# Altium PCB PCB1.PcbDoc
Units mm, origin at the board's own origin, x right, y up, seen from the top; angles counter-clockwise.
Board outline 152.4 x 101.6 mm, 2 copper layers (Top Layer, Bottom Layer); 27 components, 31 nets, 130 pads, 0 vias.
Unrouted connection lines stored in the file: 61.
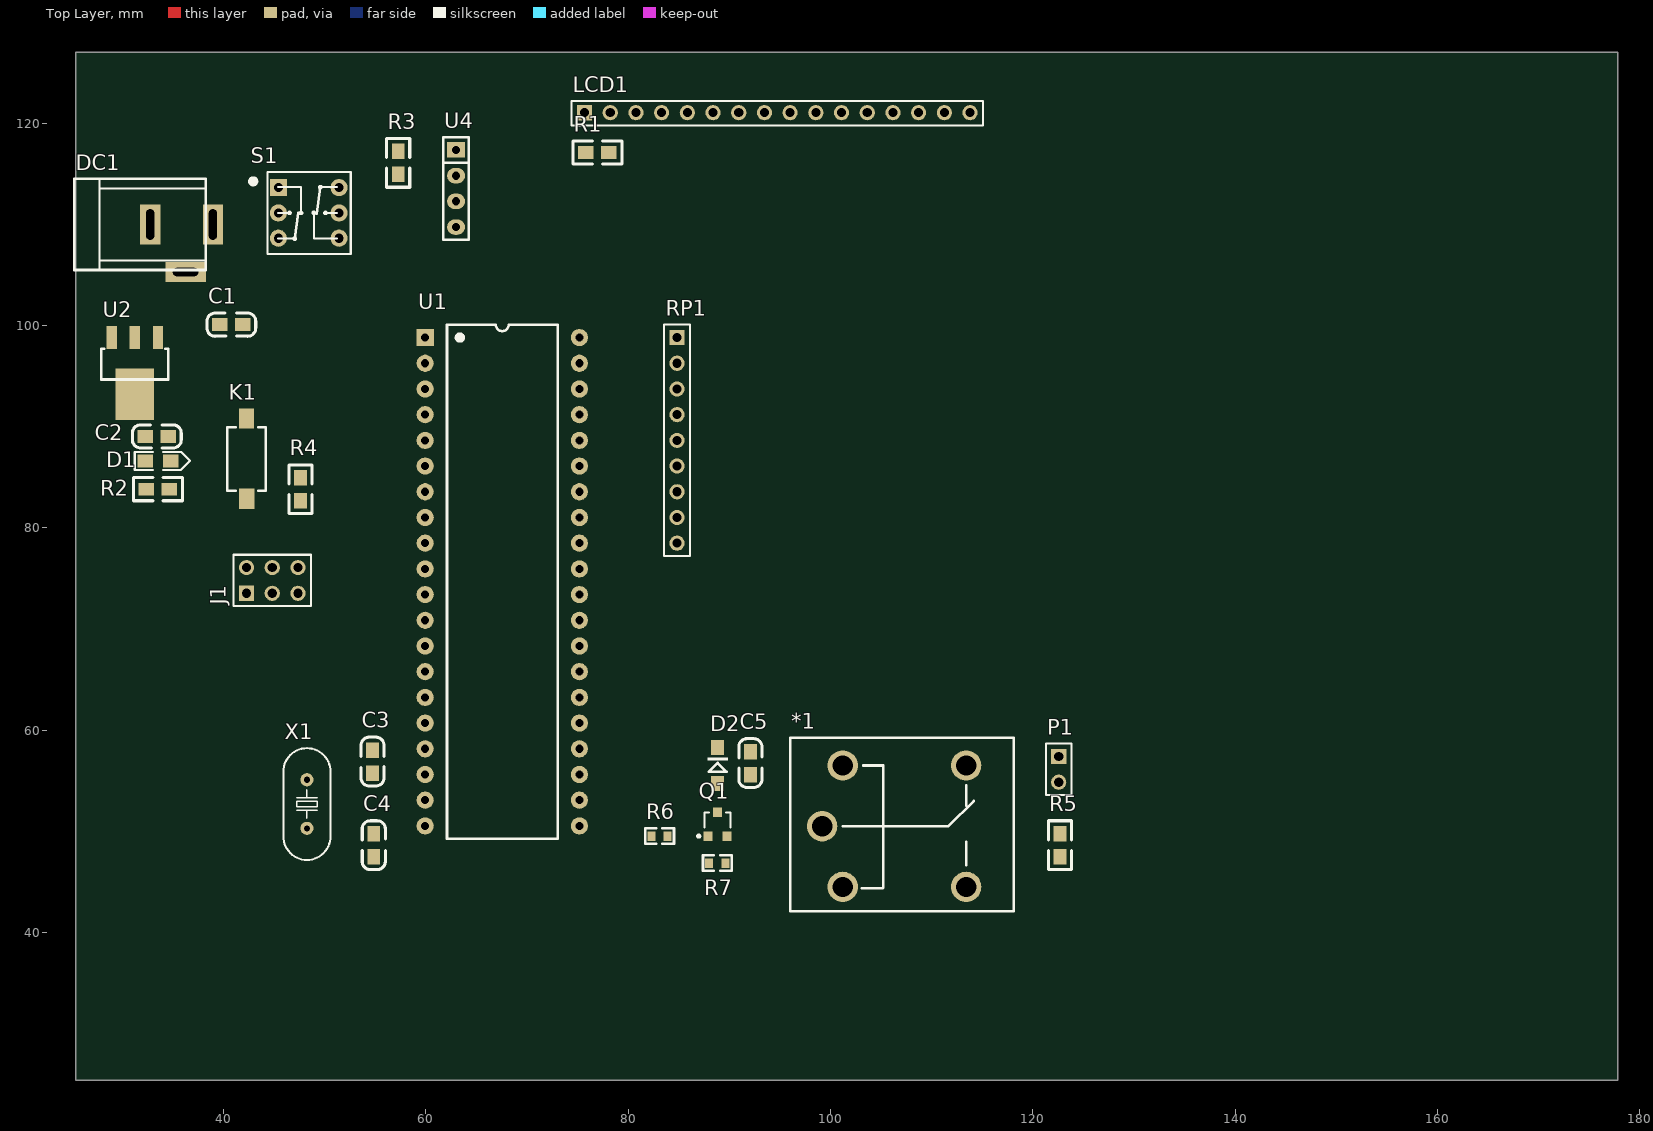
[diagram p0: Top Layer view]
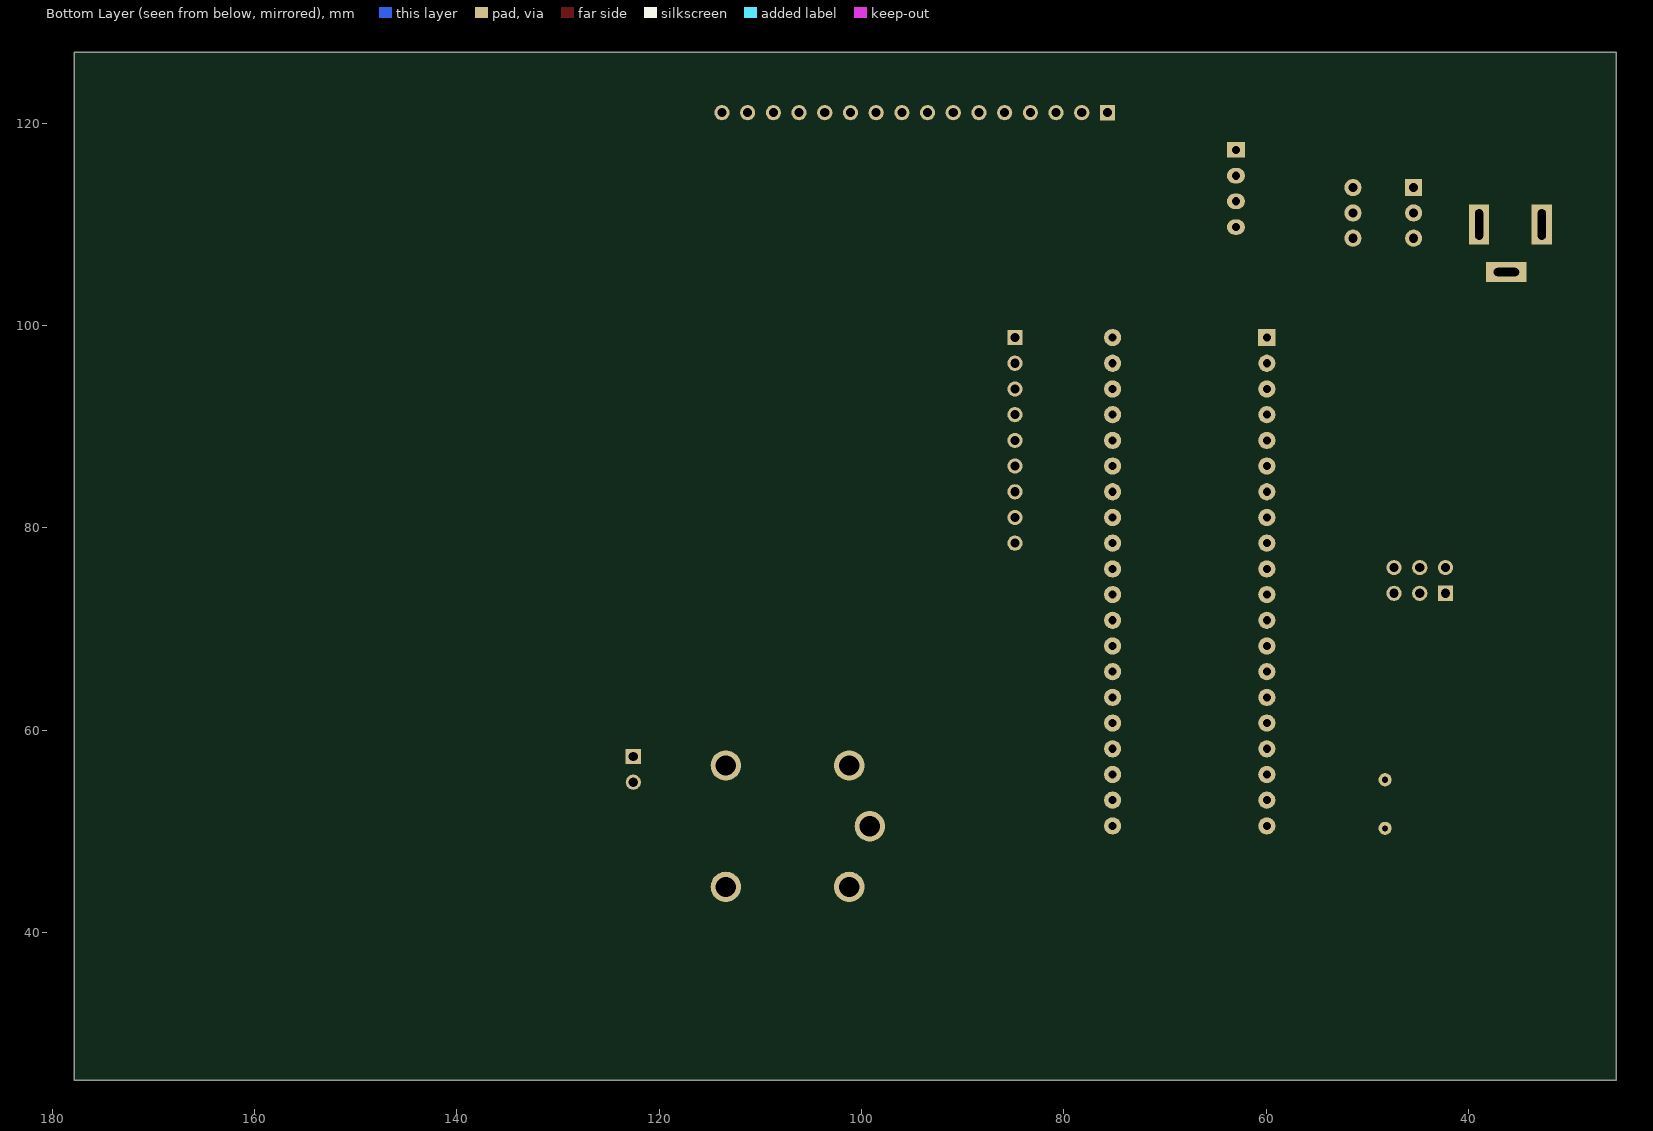
[diagram p1: Bottom Layer view, seen from below]

## Layer stack, top to bottom
Top Solder: solder mask 0.0102, Solder Resist, Dk 3.5
Top Layer: signal copper 0.0356
Dielectric 1: dielectric 0.32, FR-4, Dk 4.8
Bottom Layer: signal copper 0.0356
Bottom Solder: solder mask 0.0102, Solder Resist, Dk 3.5

## Board outline
25.4,25.4 177.8,25.4 177.8,127 25.4,127

## Design rules (kind name [scope] priority, off if disabled: settings)
Clearance [All] p1: gap=0.254 ignorepadtopadclearanceinfootprint=FALSE except(0: Arc-Hole Track-Hole SMDPad-Hole THPad-Hole Via-Hole Fill-Hole Poly-Hole Region-Hole Text-Hole)
PolygonConnect [All] p1: connectstyle=Relief reliefconductorwidth=0.254 reliefentries=4 polygonreliefangle="90 Angle" airgapwidth=0.254
RoutingVias [All] p1: holewidth=0.711 width=1.27 viastyle="Through Hole" minholewidth=0.711 minwidth=1.27 maxholewidth=0.711 maxwidth=1.27
SolderMaskExpansion [All] p1: expansion=0.102
Width [All] p1: maxlimit=0.635 minlimit=0.254 preferedwidth=0.381
30 further rules are at their usual default settings.

## Components (designator, comment, footprint, x,y, rotation, side; value= is the part's Value field where it differs from the comment)
*1 "继电器" 继电器 101.211,44.515 r0 top
C1 "104" 0805C 41.91,100.076 r180 top
C2 "104" 0805C 34.544,89.027 r180 top
C3 "22P" 0805C 54.747,58.021 r270 top
C4 "22P" 0805C 54.854,47.516 r90 top
C5 "104" 0805C 92.075,55.626 r90 top
D1 "LED" LED-0805R 32.258,86.614 r0 top
D2 "1N4148" DIODE_SOP 88.849,54.737 r90 top
DC1 "DC_Socket" DC-005 38.966,109.982 r180 top
J1 "Pin HDR2X3" "Pin HDR2X3/2.54mm-S" 42.291,73.533 r0 top
K1 "KEY" SMD-3X6X2.5 42.291,82.931 r90 top
LCD1 "LCD1602" Fe-HDR1X16/2.54-S 75.692,121.031 r90 top
P1 "Header 2" HDR1X2 122.555,57.404 r270 top
Q1 "S8050" SOT-23R 88.834,50.578 r0 top
R1 "1K" 0805R 78.105,117.094 r180 top
R2 "1K" 0805R 34.671,83.82 r180 top
R3 "1K" 0805R 57.277,114.935 r90 top
R4 "10K" 0805R 47.625,82.677 r90 top
R5 "1K" 0805R 122.682,49.784 r270 top
R6 "1k" 0603R 83.896,49.53 r180 top
R7 "10k" 0603R 89.611,46.863 r180 top
RP1 "10K" HDR1X9 84.836,98.806 r270 top
S1 "KFT DIP-7X7" "KFT DIP-8X8" 45.435,113.625 r0 top
U1 "STC89C52RC" DIP40 67.564,74.676 r0 top
U2 "AMS1117" SOT223 31.242,98.806 r180 top
U4 "DHT11" Fe-HDR1X4/2.54-S 62.992,117.348 r0 top
X1 "XTAL-2P" "OSC HC-49S" 48.26,52.705 r270 top

## Footprints (in the part's own frame and the unit in brackets; to place one, negate y for a bottom-side part, rotate by r counter-clockwise, add the part's x,y. Pads: shape width x height; smd on the part's side, far side on the other; paste and mask are expansions set on the pad)
0603R [mm]
  rect 0.8x0.965 smd: 1(0,0) 2(1.6,0)
  silkscreen extent -0.64,-0.76 2.21,0.76, body extent -0.04,-0.41 1.56,0.41, height 0.45
0805C [mil]
  rect 60x50 smd: 1(-0.71,-0.4) 2(89.29,-0.4)
  silkscreen extent -51,-45 139,45, body extent 6,-25 84,25, height 31
0805R [mil]
  rect 60x50 smd: 1(0,0) 2(90,0)
  silkscreen extent -50,-45 140,45, body extent 1,-25 80,25, height 15
DC-005 [mm] "5.5X2.1mm"
  rect 2x4 hole 0.8 slot 3 at 90 deg: 1(0,0) 2(6.2,0)
  rect 4x2 hole 0.8 slot 2.5 at 0 deg: 3(2.7,4.7)
  silkscreen extent 0.72,-4.5 13.7,4.5, body extent -0.4,-4.52 13.65,4.78, height 11.2
DIODE_SOP [mm]
  rect 1.5x1.3 smd: 1(0,0) 2(3.556,0)
  silkscreen extent 1.14,-1.02 2.56,1.02
DIP40 [mm]
  rect 1.7x1.7 hole 0.8: 1(-7.62,24.13)
  round 1.7 hole 0.8: 2(-7.62,21.59) 3(-7.62,19.05) 4(-7.62,16.51) 5(-7.62,13.97) 6(-7.62,11.43) 7(-7.62,8.89) 8(-7.62,6.35) 9(-7.62,3.81) 10(-7.62,1.27) 11(-7.62,-1.27) 12(-7.62,-3.81) 13(-7.62,-6.35) 14(-7.62,-8.89) 15(-7.62,-11.43) 16(-7.62,-13.97) 17(-7.62,-16.51) 18(-7.62,-19.05) 19(-7.62,-21.59) 20(-7.62,-24.13) 21(7.62,-24.13) 22(7.62,-21.59) 23(7.62,-19.05) 24(7.62,-16.51) 25(7.62,-13.97) 26(7.62,-11.43) 27(7.62,-8.89) 28(7.62,-6.35) 29(7.62,-3.81) 30(7.62,-1.27) 31(7.62,1.27) 32(7.62,3.81) 33(7.62,6.35) 34(7.62,8.89) 35(7.62,11.43) 36(7.62,13.97) 37(7.62,16.51) 38(7.62,19.05) 39(7.62,21.59) 40(7.62,24.13)
  silkscreen extent -5.46,-25.4 5.46,25.4, body extent -7.91,-26.19 7.65,26.16, height 4.7
Fe-HDR1X4/2.54-S [mil]
  rect 70x60 hole 32: 1(0,0)
  oval 70x60 hole 32: 2(0,-100) 3(0,-200) 4(0,-300)
  silkscreen extent -50,-350 50,50, body extent -44,-355 54,55, height 335
Fe-HDR1X16/2.54-S [mm]
  rect 1.5x1.5 hole 0.9: 1(0,0)
  round 1.5 hole 0.9: 2(0,-2.54) 3(0,-5.08) 4(0,-7.62) 5(0,-10.16) 6(0,-12.7) 7(0,-15.24) 8(0,-17.78) 9(0,-20.32) 10(0,-22.86) 11(0,-25.4) 12(0,-27.94) 13(0,-30.48) 14(0,-33.02) 15(0,-35.56) 16(0,-38.1)
  silkscreen extent -1.27,-39.37 1.14,1.27, body extent -1.25,-39.5 1.25,1.39, height 3.2
HDR1X2 [mm] "Connector; Header; 2 Position"
  rect 1.5x1.5 hole 0.9: 1(0,0)
  round 1.5 hole 0.9: 2(2.54,0)
  silkscreen extent -1.27,-1.27 3.81,1.27
HDR1X9 [mm] "Connector; Header; 9 Position"
  rect 1.5x1.5 hole 0.9: 1(0,0)
  round 1.5 hole 0.9: 2(2.54,0) 3(5.08,0) 4(7.62,0) 5(10.16,0) 6(12.7,0) 7(15.24,0) 8(17.78,0) 9(20.32,0)
  silkscreen extent -1.27,-1.27 21.59,1.27
"KFT DIP-8X8" [mm]
  rect 1.7x1.7 hole 0.9: 1(0,0)
  round 1.7 hole 0.9: 2(0,-2.5) 3(0,-5) 4(6,-5) 5(6,-2.5) 6(6,0)
  silkscreen extent -2.69,-6.56 7.15,1.56, body extent -1.08,-6.48 6.92,1.52, height 13.1
LED-0805R [mil]
  rect 60x50 smd: A(0,0) K(100,0)
  silkscreen extent -40,-35 175,35, body extent 11,-24 89,25, height 32
"OSC HC-49S" [mm]
  round 1.3 hole 0.6: 1(-2.4,0) 2(2.4,0)
  silkscreen extent -5.52,-2.32 5.52,2.33, body extent -5.53,-2.29 5.53,2.36, height 4.13
"Pin HDR2X3/2.54mm-S" [mm] "Connector; Header; 3x2 Position"
  rect 1.5x1.5 hole 0.9: 1(0,0)
  round 1.5 hole 0.9: 2(0,2.54) 3(2.54,0) 4(2.54,2.54) 5(5.08,0) 6(5.08,2.54)
  silkscreen extent -1.27,-1.27 6.35,3.81, body extent -1.27,-1.27 6.35,3.81, height 7.58
SMD-3X6X2.5 [mm]
  rect 2x1.5 smd: 1(-0.059,-0.02) 3(7.874,0)
  silkscreen extent 0.73,-1.9 7.03,1.9, body extent -0.19,-1.78 7.81,1.72, height 2.59
SOT223 [mil]
  rect 40x90 smd: 1(-90,0) 2(0,0) 3(90,0)
  rect 150x200 smd: 2(0,220)
  silkscreen extent -130,43 130,163, body extent -130,-30 126,246, height 65
SOT-23R [mm]
  rect 0.9x0.95 smd: 1(0.95,-1.048) 2(-0.95,-1.048) 3(0,1.302)
  silkscreen extent -1.98,-1.17 1.3,1.3
继电器 [mm]
  round 3 hole 2: 1(0,12) 2(-2.032,6) 3(0,0) 4(12.2,12) 5(12.2,0)
  silkscreen extent -5.21,-2.41 16.89,14.73

## Part data
C1 C2 C3 C4 C5: library part CAP, "无极性电容"
D2: library part D
P1: "Header, 2-Pin", LatestRevisionDate=17-Jul-2002, LatestRevisionNote="Re-released for DXP Platform.", Publisher="Altium Limited"
Q1: library part NPN, "8050/BCW846/BCW847"
R1 R2 R3 R4 R5 R6 R7: library part RES
RP1: library part "Header 9", "Header, 9-Pin", LatestRevisionDate=17-Jul-2002, LatestRevisionNote="Re-released for DXP Platform.", Publisher="Altium Limited"
U2: "三端稳压芯片"
X1: "2脚无源脚晶振"

## Nets (pads, with @x,y where several pads share a name; then routed paths per layer and width w, separated by ;. In a path a pad name is that pad's centre, name@x,y a point inside that pad or via, vN(x,y) a via of type N, cw(c..) or ccw(c..) an arc to the next point about the centre after c; other vN are vias at no path point)
AJ: R6.2 U1.21
DHT11-DATA: R3.1 U1.1 U4.2
GND: C1.1 C2.1 C3.1 C4.1 LCD1.1 LCD1.16 Q1.1 R1.1 R2.2 R4.1 R5.2 R7.1 S1.4 S1.6 U1.20 U2.1 U4.4
LCD-D0: LCD1.7 RP1.2 U1.39
LCD-D1: LCD1.8 RP1.3 U1.38
LCD-D2: LCD1.9 RP1.4 U1.37
LCD-D3: LCD1.10 RP1.5 U1.36
LCD-D4: LCD1.11 RP1.6 U1.35
LCD-D5: LCD1.12 RP1.7 U1.34
LCD-D6: LCD1.13 RP1.8 U1.33
LCD-D7: LCD1.14 RP1.9 U1.32
LCD-E: LCD1.6 U1.26
LCD-RS: LCD1.4 U1.28
LCD-RW: LCD1.5 U1.27
MCU-RX: J1.6 U1.10
MCU-TX: J1.5 U1.11
Net*1_3: *1.3 C5.1 D2.1 Q1.3
Net*1_4: *1.4 P1.1
NetC3_2: C3.2 U1.18 X1.1
NetC4_2: C4.2 U1.19 X1.2
NetD1_K: D1.K R2.1
NetDC1_1: DC1.1 S1.2
NetDC1_2: DC1.2 DC1.3 S1.5
NetLCD1_3: LCD1.3 R1.2
NetP1_2: P1.2 R5.1
NetQ1_2: Q1.2 R6.1 R7.2
REST: K1.1 R4.2 U1.9
VDD3.3: C2.2 D1.A U2.2
VDD5: *1.1 *1.2 C1.2 C5.2 D2.2 K1.3 LCD1.2 LCD1.15 R3.2 RP1.1 S1.1 U1.31 U1.40 U2.3 U4.1
wifi-rx: J1.1 J1.3
wifi-tx: J1.2 J1.4
pads on no net: *1.5 S1.3 U1.2 U1.3 U1.4 U1.5 U1.6 U1.7 U1.8 U1.12 U1.13 U1.14 U1.15 U1.16 U1.17 U1.22 U1.23 U1.24 U1.25 U1.29 U1.30 U4.3

## Silkscreen, mask and mechanical layers (free items; w line width, h text height)
Mechanical 1:
  lines w0.508: 25.4,25.4 25.4,125.4 125.4,125.4 125.4,25.4 25.4,25.4